# Altium PCB Clock.PcbDoc
Units mil, origin at the board's own origin, x right, y up, seen from the top; angles counter-clockwise.
Board outline 5830 x 1965 mil, 4 copper layers (Top Layer, Layer 1, Layer 2, Bottom Layer), stack 22.378 mil thick; 27 components, 78 nets, 221 pads, 37 vias.
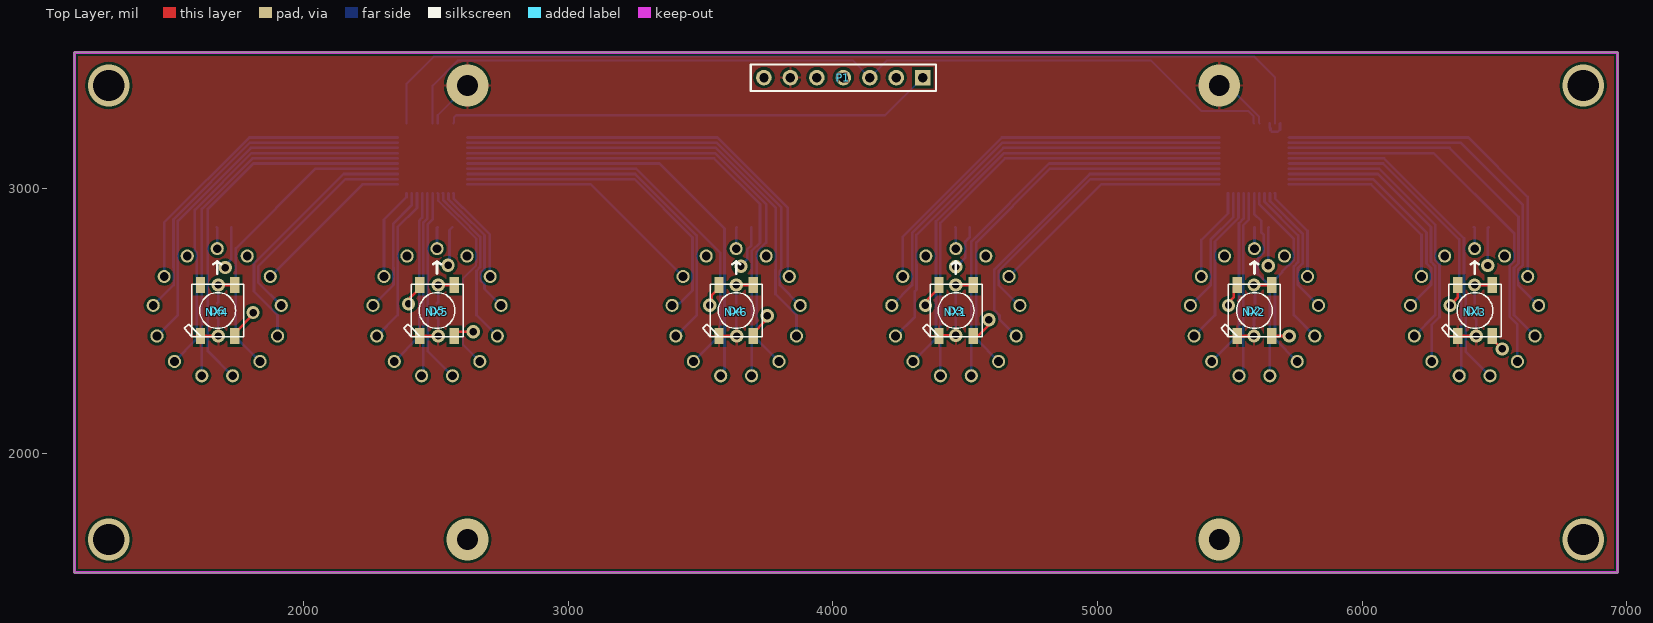
[diagram p0: Top Layer view]
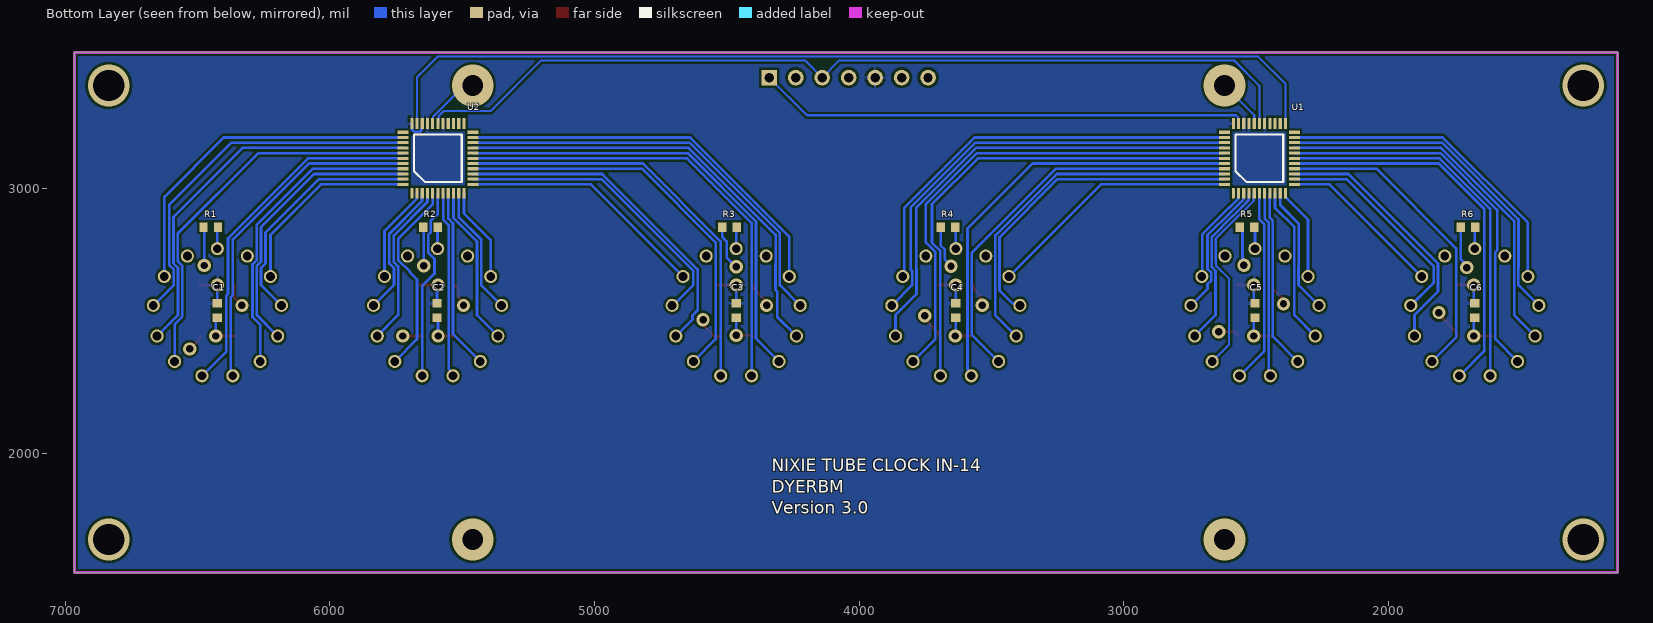
[diagram p1: Bottom Layer view, seen from below]
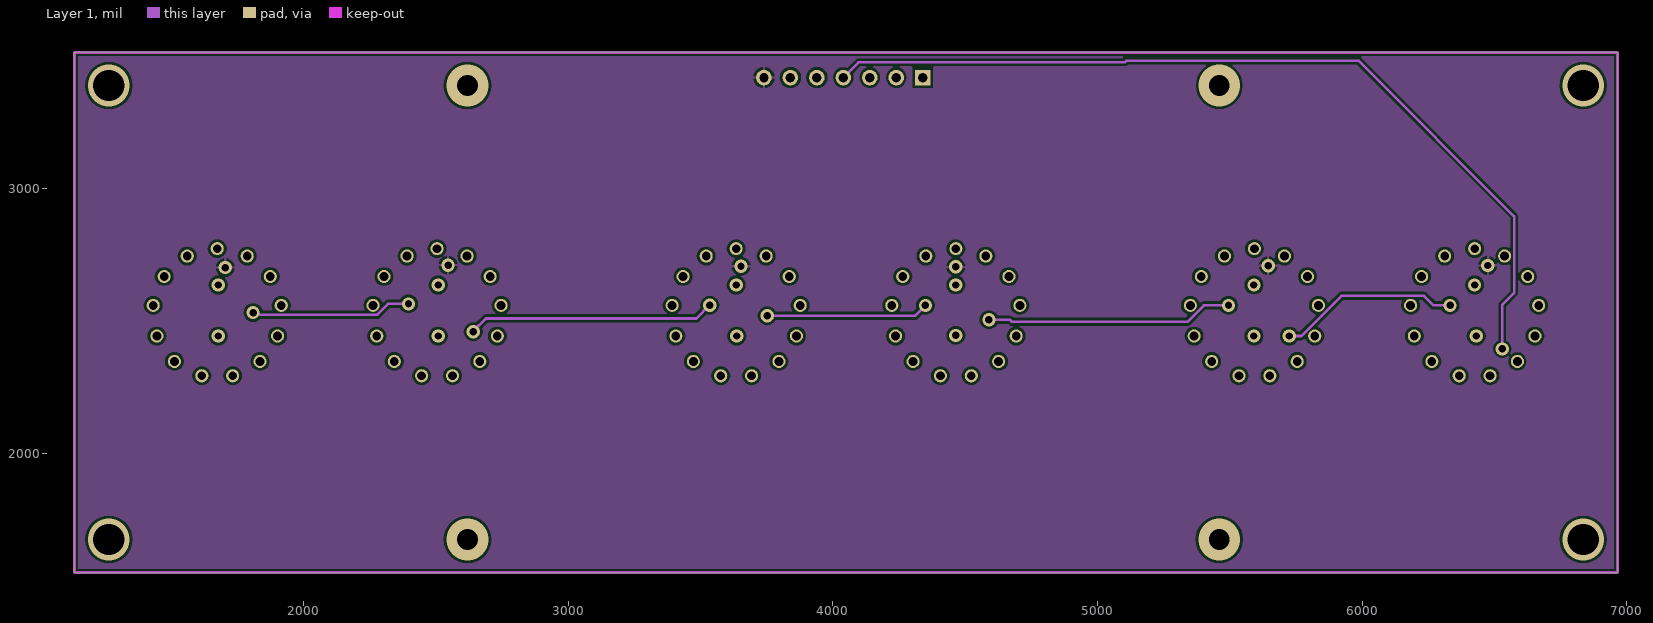
[diagram p2: Layer 1]
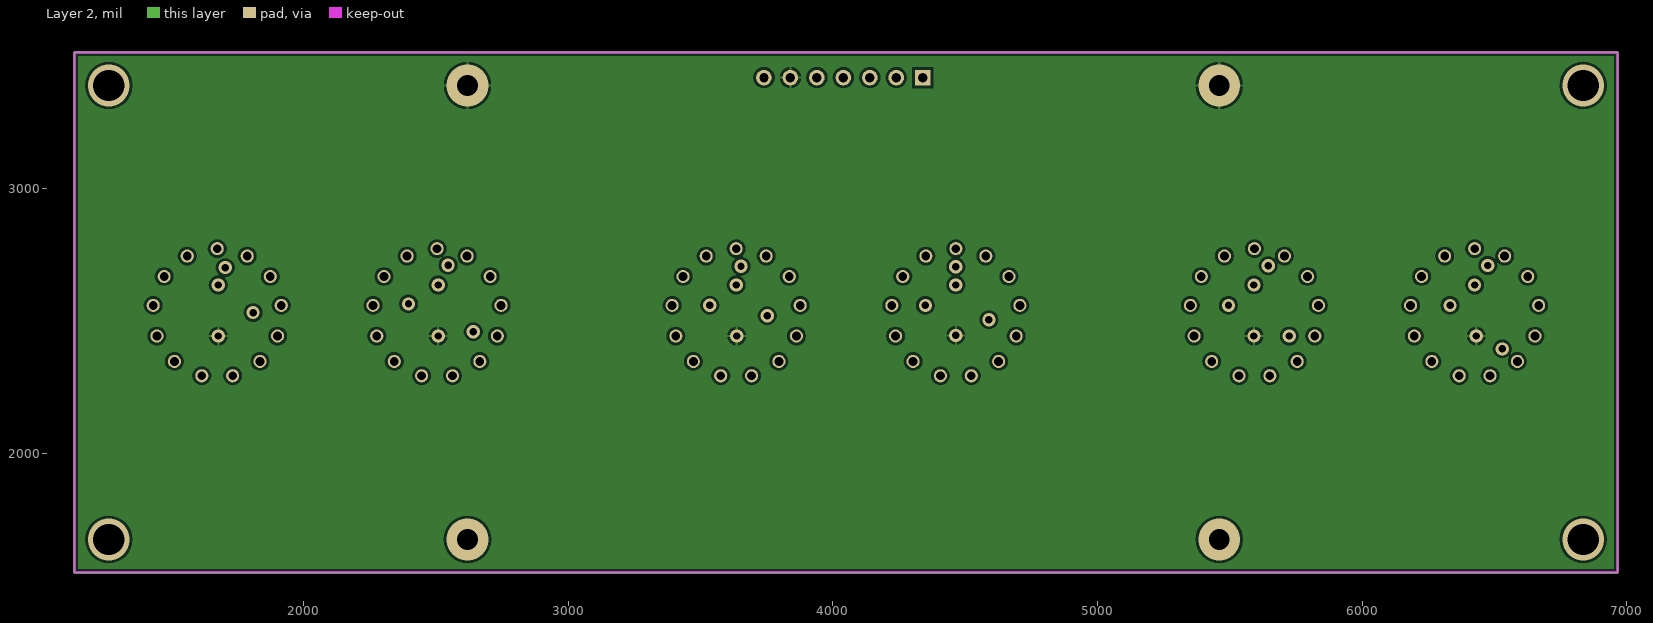
[diagram p3: Layer 2]

## Layer stack, top to bottom
Top Solder: solder mask 0.4, Solder Resist, Dk 3.5
Top Layer: signal copper 1.4
Dielectric 2: prepreg 2.8, PP-006, Dk 4.1
Layer 1: signal copper 0.689
Dielectric 1: dielectric 12.6, FR-4, Dk 4.8
Layer 2: signal copper 0.689
Dielectric 3: prepreg 2.8, PP-006, Dk 4.1
Bottom Layer: signal copper 1.4
Bottom Solder: solder mask 0.4, Solder Resist, Dk 3.5

## Board outline
1135,1550 1135,3515 6965,3515 6965,1550

## Design rules (kind name [scope] priority, off if disabled: settings)
Clearance [All] p1: gap=10 ignorepadtopadclearanceinfootprint=FALSE except(0: Arc-Hole Track-Hole SMDPad-Hole THPad-Hole Via-Hole Fill-Hole Poly-Hole Region-Hole Text-Hole; 6: Arc-Arc Arc-Track Arc-SMDPad Arc-THPad Track-Track Track-SMDPad Track-THPad SMDPad-SMDPad SMDPad-THPad THPad-THPad)
Height [All] p1: minheight=0 maxheight=20000 prefheight=500
PolygonConnect [All] p1: connectstyle=Relief reliefconductorwidth=10 reliefentries=4 polygonreliefangle="90 Angle" airgapwidth=10
RoutingVias [All] p1: holewidth=28 width=25 viastyle="Through Hole" minholewidth=28 minwidth=25 maxholewidth=28 maxwidth=50
SolderMaskExpansion [All] p1: expansion=4 istentingtop=FALSE
Width [All] p1: maxlimit=25 minlimit=8 preferedwidth=10 toplayer_prefwidth=8 midlayer1_minwidth=10 midlayer1_maxwidth=10 midlayer2_minwidth=10 midlayer2_maxwidth=10 bottomlayer_prefwidth=8 minimp=50.000000 maximp=50.000000 favimp=50.000000
29 further rules are at their usual default settings.

## Components (designator, comment, footprint, x,y, rotation, side; value= is the part's Value field where it differs from the comment)
C1 "0.1uF" 1608[0603] 6425,2540 r90 bottom
C2 "0.1uF" 1608[0603] 5595,2540 r90 bottom
C3 "0.1uF" 1608[0603] 4465,2540 r90 bottom
C4 "0.1uF" 1608[0603] 3635,2540 r90 bottom
C5 "0.1uF" 1608[0603] 2505,2540 r90 bottom
C6 "0.1uF" 1608[0603] 1674.44,2540 r90 bottom
D1 "WS2812B" WS2812B 6426.22,2540 r90 top
D2 "WS2812B" WS2812B 5593.08,2540 r90 top
D3 "WS2812B" WS2812B 4466.22,2540 r90 top
D4 "WS2812B" WS2812B 3635,2540 r90 top
D5 "WS2812B" WS2812B 2505,2540 r90 top
D6 "WS2812B" WS2812B 1676.22,2540 r90 top
NX1 "in-14-2" IN-14 4465,2530 r180 top locked
NX2 "in-14-2" IN-14 5593.08,2530 r180 top locked
NX3 "in-14-2" IN-14 6425,2530 r180 top locked
NX4 "in-14-2" IN-14 1674.44,2530 r180 top locked
NX5 "in-14-2" IN-14 2505,2530 r180 top locked
NX6 "in-14-2" IN-14 3635,2530 r180 top locked
P1 "Header 7" HDR1X7 4340,3420 r180 top locked
R1 "Res1" 1608[0603] 6450,2855 r0 bottom value=20K
R2 "Res1" 1608[0603] 5620,2855 r0 bottom value=20K
R3 "Res1" 1608[0603] 4490,2855 r0 bottom value=20K
R4 "Res1" 1608[0603] 3665,2855 r0 bottom value=20K
R5 "Res1" 1608[0603] 2535,2855 r0 bottom value=20K
R6 "Res1" 1608[0603] 1700,2855 r0 bottom value=20K
U1 "HV5623" Quad44 2586.54,2983.11 r90 bottom
U2 "HV5623" Quad44 5690.31,2983.11 r90 bottom

## Footprints (in the part's own frame and the unit in brackets; to place one, negate y for a bottom-side part, rotate by r counter-clockwise, add the part's x,y. Pads: shape width x height; smd on the part's side, far side on the other; paste and mask are expansions set on the pad)
1608[0603] [mm] "Chip Capacitor, Body 1.6x0.8mm, IPC High Density"
  rect 0.8x0.9 smd: 1(-0.7,0) 2(0.7,0)
  body extent -0.87,-0.48 0.87,0.48, height 1.3
HDR1X7 [mm] "Connector; Header; 7 Position"
  rect 1.5x1.5 hole 0.9: 1(0,0)
  round 1.5 hole 0.9: 2(2.54,0) 3(5.08,0) 4(7.62,0) 5(10.16,0) 6(12.7,0) 7(15.24,0)
  silkscreen extent -1.27,-1.27 16.51,1.27
IN-14 [mil]
  round 49.6 hole 33.07: 0(200.56,-138.44) 1(-200.56,-138.44) 2(-241.92,-29.37) 3(-227.86,86.42) 4(-161.6,182.41) 5(-58.32,236.62) 6(58.32,236.62) 7(161.6,182.41) 8(227.86,86.42) 9(241.92,-29.37) A(0,-243.7) LHDP(113.25,-215.78) RHDP(-113.25,-215.78)
  silkscreen extent -15,-195 15,-150, body extent -364,-364 364,364, height 1872
Quad44 [mm]
  oval 1.05x0.3 smd: 1(0,0)
  rect 1.05x0.3 smd: 2(0,-0.5) 3(0,-1) 4(0,-1.5) 5(0,-2) 6(0,-2.5) 7(0,-3) 8(0,-3.5) 9(0,-4) 10(0,-4.5) 11(0,-5) 23(6.7,-5) 24(6.7,-4.5) 25(6.7,-4) 26(6.7,-3.5) 27(6.7,-3) 28(6.7,-2.5) 29(6.7,-2) 30(6.7,-1.5) 31(6.7,-1) 32(6.7,-0.5) 33(6.7,0)
  rect 0.3x1.05 smd: 12(0.85,-5.85) 13(1.35,-5.85) 14(1.85,-5.85) 15(2.35,-5.85) 16(2.85,-5.85) 17(3.35,-5.85) 18(3.85,-5.85) 19(4.35,-5.85) 20(4.85,-5.85) 21(5.35,-5.85) 22(5.85,-5.85) 34(5.85,0.85) 35(5.35,0.85) 36(4.85,0.85) 37(4.35,0.85) 38(3.85,0.85) 39(3.35,0.85) 40(2.85,0.85) 41(2.35,0.85) 42(1.85,0.85) 43(1.35,0.85) 44(0.85,0.85)
  silkscreen extent 1.06,-4.79 5.64,-0.21
WS2812B [mm]
  rect 1.5x0.9 smd: 1-VDD(2.45,-1.65) 2-DOUT(2.45,1.65) 3-GND(-2.45,1.65) 4-DIN(-2.45,-1.65)
  silkscreen extent -2.5,-2.5 2.5,3.2

## Part data
C1 C2 C3 C4 C5 C6: library part Cap, "Capacitor", LatestRevisionDate=17-Jul-2002, LatestRevisionNote="Re-released for DXP Platform.", PackageDescription="Radial Cap, Thru-Hole; 2 Leads; 0.3 in Pin Spacing", PackageReference=RAD-0.3, Published=8-Jun-2000, Publisher="Altium Limited"
D1 D2 D3 D4 D5 D6: "Raspberry Pi HAT _40 pin_ Wheeled Robotics Kit", Package=None, Availability=Unavailable, MF="SparkFun Electronics", MP=WS2812B, Price=None, SnapEDA_Link=https://www.snapeda.com/parts/WS2812B/Worldsemi/view-part/1038297/?ref=snap
NX1 NX2 NX3 NX4 NX5 NX6: library part in-8
P1: "Header, 7-Pin", LatestRevisionDate=17-Jul-2002, LatestRevisionNote="Re-released for DXP Platform.", Publisher="Altium Limited"
R1 R2 R3 R4 R5 R6: "Resistor", LatestRevisionDate=17-Jul-2002, LatestRevisionNote="Re-released for DXP Platform.", PackageDescription="Axial Device, Thru-Hole; 2 Leads; 0.3 in Pin Spacing", PackageReference=AXIAL-0.3, Published=8-Jun-2000, Publisher="Altium Limited"
U1 U2: library part HV5622

## Via types
v1: diameter 50, hole 28, Top Layer to Bottom Layer, tented both sides, 29 vias
v2: diameter 157.48, hole 118.11, Top Layer to Bottom Layer, 4 vias
v3: diameter 157.48, hole 78.74, Top Layer to Bottom Layer, 4 vias

## Nets (pads, with @x,y where several pads share a name; then routed paths per layer and width w, separated by ;. In a path a pad name is that pad's centre, name@x,y a point inside that pad or via, vN(x,y) a via of type N, cw(c..) or ccw(c..) an arc to the next point about the centre after c; other vN are vias at no path point)
5V: C1.2 C2.2 C3.2 C4.2 C5.2 C6.2 D1.1-VDD D2.1-VDD D3.1-VDD D4.1-VDD D5.1-VDD D6.1-VDD P1.5 U1.27 U1.30 U1.31 U1.33 U2.27 U2.30 U2.31 U2.33 | length 897.9
  Top Layer w10: v1(1678.64,2636.46) D6.1-VDD ; v1(2509.2,2636.46) D5.1-VDD ; v1(3635,2636.46) D4.1-VDD ; v1(4465,2636.53) 4531.11,2636.53 D3.1-VDD ; v1(5591.26,2636.53) D2.1-VDD D2.1-VDD ; v1(6425,2636.46) D1.1-VDD
  Bottom Layer w10: C6.2 1678.64,2571.76 v1(1678.64,2636.46) ; C5.2 2509.2,2571.76 v1(2509.2,2636.46) ; C4.2 v1(3635,2636.46) ; C3.2 v1(4465,2636.53) ; v1(5591.26,2636.53) 5595,2632.79 C2.2 ; U2.31 5650.94,3232.13 5653.72,3229.35 5653.72,3221.66 5660.17,3215.22 5681.09,3215.22 5689.41,3223.54 5689.41,3245.98 U2.33 ; C1.2 v1(6425,2636.46)
CLK: P1.3 U1.28 U2.28 | length 3452.3
  Bottom Layer w8: U1.28 2488.11,3389.26 2583.85,3485 4075,3485 P1.3 4205,3485 5201.21,3485 5392.65,3293.56 5569.19,3293.56 5589.98,3272.77 5589.98,3248.8 U2.28
DIN: P1.1 U1.32 | length 1857.2
  Bottom Layer w8: U1.32 2568.76,3248.8 2568.76,3269.83 2576.49,3277.56 4197.56,3277.56 P1.1
GND: C1.1 C2.1 C3.1 C4.1 C5.1 C6.1 D1.3-GND D2.3-GND D3.3-GND D4.3-GND D5.3-GND D6.3-GND P1.6 U1.29 U2.29 | length 1235.5
  Top Layer w10: D6.3-GND 1611.3,2443.58 v1(1678.64,2443.58) ; D5.3-GND 2440.08,2443.58 v1(2509.2,2443.58) ; D4.3-GND 3570.08,2443.58 v1(3637.44,2443.58) ; D3.3-GND 4403.74,2446.02 v1(4465,2446.02) ; D2.3-GND 5528.16,2443.58 v1(5591.26,2443.58) ; D1.3-GND v1(6431,2443.54)
  Bottom Layer w8: U1.29 2507.8,3277.8 v3(2620,3390) ; v3(5460,3390) 5492.55,3390 5609.67,3272.88 5609.67,3248.8 U2.29
  Bottom Layer w10: C6.1 1678.64,2508.24 v1(1678.64,2443.58) ; C5.1 2509.2,2508.24 v1(2509.2,2443.58) ; C4.1 3635,2446.02 v1(3637.44,2443.58) ; v1(4465,2446.02) C3.1 ; v1(5591.26,2443.58) 5591.26,2508.7 C2.1 ; C1.1 6431,2506.44 v1(6431,2443.54)
HV: P1.7 R1.2 R2.2 R3.2 R4.2 R5.2 R6.2 | length 941.2
  Bottom Layer w10: v1(1705,2702.03) 1705,2712.86 1727.56,2735.42 R6.2 ; v1(2546.53,2711.36) 2551.81,2716.64 2551.81,2844.25 R5.2 ; v1(3653.32,2707.39) 3653.32,2709.68 3676.77,2733.12 3676.77,2770.18 3692.56,2785.98 R4.2 ; v1(4465,2705) 4500.8,2740.8 4500.8,2800.97 4517.56,2817.73 R3.2 ; v1(5644.88,2709.2) 5644.88,2852.32 R2.2 ; v1(6475,2710) 6475,2852.44 R1.2
LED: D1.4-DIN P1.4 | length 3388.5
  Top Layer w10: D1.4-DIN 6491.18,2431.73 6527.91,2395 v1(6529.16,2395)
  Layer 1 w10: P1.4 4097.46,3477.46 5103.77,3477.46 5110.06,3483.74 5986.26,3483.74 6574.05,2895.95 6574.05,2605.66 6529.16,2560.77 v1(6529.16,2395)
NetD1_2-DOUT: D1.2-DOUT D2.4-DIN | length 840.9
  Top Layer w10: D2.4-DIN 5658.08,2443.58 v1(5725,2443.58) ; v1(6332.24,2559.37) 6361.26,2588.39 D1.2-DOUT
  Layer 1 w10: v1(5725,2443.58) 5770.31,2443.58 5921.9,2595.17 6233.63,2595.17 6269.43,2559.37 v1(6332.24,2559.37)
NetD2_2-DOUT: D2.2-DOUT D3.4-DIN | length 1127.7
  Top Layer w10: D3.4-DIN 4539.72,2435 4590,2485.28 v1(4590,2505) ; v1(5495,2559.37) 5495,2570.19 5515.4,2590.6 5515.4,2623.74 D2.2-DOUT
  Layer 1 w10: v1(4590,2505) 4669.37,2505 4677.19,2497.18 5339.61,2497.18 5401.79,2559.37 v1(5495,2559.37)
NetD3_2-DOUT: D3.2-DOUT D4.4-DIN | length 785.5
  Top Layer w10: D4.4-DIN 3699.96,2455.35 3744.79,2500.19 3744.79,2512.35 v1(3752.45,2520) ; v1@4357.65,2581.04 4401.26,2624.65 D3.2-DOUT
  Layer 1 w10: v1(3752.45,2520) 4310.63,2520 v1(4350,2559.37)
NetD4_2-DOUT: D4.2-DOUT D5.4-DIN | length 1107.4
  Top Layer w10: D5.4-DIN 2569.96,2447.28 2582.68,2460 v1(2641.64,2460) ; v1(3535,2560) 3542.65,2567.65 3542.65,2597.26 3570.04,2624.65 D4.2-DOUT
  Layer 1 w10: v1(2641.64,2460) 2641.64,2461.64 2690,2510 3485,2510 v1(3535,2560)
NetD5_2-DOUT: D5.2-DOUT D6.4-DIN | length 814.1
  Top Layer w10: D6.4-DIN 1741.18,2455.35 1810,2524.17 v1(1810,2532.09) ; v1(2397.2,2565) 2404.85,2572.65 2404.85,2589.46 2440.04,2624.65 D5.2-DOUT
  Layer 1 w10: v1(1810,2532.09) 1827.28,2532.09 1835.8,2523.57 2277.91,2523.57 2319.34,2565 v1(2397.2,2565)
NetNX1_0: NX1.0 U2.21 | length 1501.4
  Bottom Layer w10: NX1.0 4264.44,2819.16 4639.02,3193.74 U2.21
NetNX1_1: NX1.1 U2.12 | length 938.6
  Bottom Layer w10: NX1.1 5013.69,3016.57 U2.12
NetNX1_2: NX1.2 U2.13 | length 1142
  Bottom Layer w10: NX1.2 4703.76,2559.37 4626.6,2636.53 4626.6,2688.97 4973.89,3036.26 U2.13
NetNX1_3: NX1.3 U2.14 | length 1284.8
  Bottom Layer w10: NX1.3 4630,2506.44 4630,2521.57 4610.6,2540.97 4610.6,2695.6 4970.94,3055.95 U2.14
NetNX1_4: NX1.4 U2.15 | length 1517.4
  Bottom Layer w10: NX1.4 4542.45,2431.74 4542.45,2797.36 4820.72,3075.63 U2.15
NetNX1_5: NX1.5 U2.16 | length 1566.1
  Bottom Layer w10: NX1.5 4523.32,2800.86 4817.77,3095.32 U2.16
NetNX1_6: NX1.6 U2.17 | length 1731.9
  Bottom Layer w10: NX1.6 4406.68,2870.89 4650.79,3115 U2.17
NetNX1_7: NX1.7 U2.18 | length 1741.9
  Bottom Layer w10: NX1.7 4390,2434.19 4390,2876.83 4647.85,3134.68 U2.18
NetNX1_8: NX1.8 U2.19 | length 1695
  Bottom Layer w10: NX1.8 4310,2516.44 4310,2611.96 4316.24,2618.2 4316.24,2713.72 4315.95,2714.02 4315.95,2825.41 4644.91,3154.37 U2.19
NetNX1_9: NX1.9 U2.20 | length 1606.5
  Bottom Layer w10: NX1.9 4300.24,2636.53 4300.24,2707.1 4299.95,2707.39 4299.95,2832.04 4641.97,3174.05 U2.20
NetNX1_A: NX1.A R3.1 | length 82.4
  Bottom Layer w10: R3.1 4465,2852.44 NX1.A
NetNX2_0: NX2.0 U2.11 | length 356.5
  Bottom Layer w10: NX2.0 5392.52,2806.14 5493.46,2907.08 U2.11
NetNX2_1: NX2.1 U2.2 | length 365.6
  Bottom Layer w10: U2.2 5671.54,2982.2 5671.54,2963.22 5793.53,2841.22 5793.53,2837.08 5793.64,2836.97 NX2.1
NetNX2_2: NX2.2 U2.3 | length 514.2
  Bottom Layer w10: U2.3 5651.85,2982.2 5651.85,2953.15 5775,2830 5775,2717.45 5757.84,2700.29 5757.84,2636.53 NX2.2
NetNX2_3: NX2.3 U2.4 | length 631.6
  Bottom Layer w10: U2.4 5631.26,2950.9 5758.13,2824.03 5758.13,2723.21 5741.84,2706.92 5741.84,2522.68 NX2.3
NetNX2_4: NX2.4 U2.5 | length 754.1
  Bottom Layer w10: U2.5 5611.57,2941.37 5742.13,2810.81 5742.13,2730.95 5697.96,2686.78 5697.96,2684.42 5670.53,2656.98 5670.53,2431.74 NX2.4
NetNX2_5: NX2.5 U2.6 | length 734.3
  Bottom Layer w10: U2.6 5591.89,2904.57 5619.19,2877.27 5619.19,2834.35 5628.88,2824.66 5628.88,2758.87 5604.88,2734.87 5604.88,2679.48 5651.4,2632.96 NX2.5
NetNX2_6: NX2.6 U2.7 | length 705.2
  Bottom Layer w10: NX2.6 5534.76,2302.8 5551,2319.04 5551,2862.58 5572.2,2883.78 U2.7
NetNX2_7: NX2.7 U2.8 | length 685.7
  Bottom Layer w10: NX2.7 5535,2451.11 5535,2869.21 5552.52,2886.73 U2.8
NetNX2_8: NX2.8 U2.9 | length 609.2
  Bottom Layer w10: NX2.8 5444.32,2522.68 5444.32,2689.9 5444.03,2690.19 5444.03,2800.86 5532.83,2889.67 U2.9
NetNX2_9: NX2.9 U2.10 | length 491.1
  Bottom Layer w10: NX2.9 5428.32,2636.53 5428.32,2683.27 5428.03,2683.56 5428.03,2807.49 5513.15,2892.61 U2.10
NetNX2_A: NX2.A R2.1 | length 81.6
  Bottom Layer w10: R2.1 5593.08,2854.36 NX2.A
NetNX3_0: NX3.0 U2.44 | length 736.9
  Bottom Layer w10: U2.44 6033.43,3016.57 6224.44,2825.56 NX3.0
NetNX3_1: NX3.1 U2.35 | length 1295.7
  Bottom Layer w10: U2.35 6401.26,3193.74 6625.56,2969.44 NX3.1
NetNX3_2: NX3.2 U2.36 | length 1398.7
  Bottom Layer w10: U2.36 6370.94,3174.05 6607,2938 6607,2711.58 6589.76,2694.34 6589.76,2636.53 NX3.2
NetNX3_3: NX3.3 U2.37 | length 1465.4
  Bottom Layer w10: U2.37 6330.63,3154.37 6591,2894 6591,2718.2 6573.76,2700.96 6573.76,2522.68 NX3.3
NetNX3_4: NX3.4 U2.38 | length 1478.9
  Bottom Layer w10: U2.38 6270.31,3134.68 6575,2830 6575,2726.44 6557.76,2709.2 6557.76,2516.06 6586.6,2487.21 NX3.4
NetNX3_5: NX3.5 U2.39 | length 1346.4
  Bottom Layer w10: U2.39 6082.63,3115 6385,2812.63 6385,2602.16 6391,2596.16 6391,2385.7 NX3.5
NetNX3_6: NX3.6 U2.40 | length 1283.6
  Bottom Layer w10: U2.40 6079.69,3095.32 6366.68,2808.32 6366.68,2597.86 6375,2589.54 6375,2319.04 6374.26,2318.3 6374.26,2300.96 NX3.6
NetNX3_7: NX3.7 U2.41 | length 1175
  Bottom Layer w10: U2.41 6064.37,3075.63 6275.95,2864.05 6275.95,2730.95 6292.24,2714.66 6292.24,2515.09 6263.4,2486.24 NX3.7
NetNX3_8: NX3.8 U2.42 | length 1070.4
  Bottom Layer w10: U2.42 6059.06,3055.95 6259.95,2855.05 6259.95,2724.32 6276.24,2708.03 6276.24,2522.68 NX3.8
NetNX3_9: NX3.9 U2.43 | length 917.3
  Bottom Layer w10: U2.43 6041.74,3036.26 6243,2835 6243,2717.95 6260.24,2700.7 6260.24,2636.53 NX3.9
NetNX3_A: NX3.A R1.1 | length 82.4
  Bottom Layer w10: R1.1 6425,2852.44 NX3.A
NetNX4_0: NX4.0 U1.21 | length 1219
  Bottom Layer w10: NX4.0 1473.88,2871.76 1795.86,3193.74 U1.21
NetNX4_1: NX4.1 U1.12 | length 625.4
  Bottom Layer w10: NX4.1 2223.14,3016.57 U1.12
NetNX4_2: NX4.2 U1.13 | length 846.7
  Bottom Layer w10: NX4.2 1829.14,2646.59 1829.14,2706.17 2159.23,3036.26 U1.13
NetNX4_3: NX4.3 U1.14 | length 993.7
  Bottom Layer w10: NX4.3 1902.3,2522.8 1813.14,2611.96 1813.14,2716.82 2152.27,3055.95 U1.14
NetNX4_4: NX4.4 U1.15 | length 1200.9
  Bottom Layer w10: NX4.4 1745,2438.63 1745,2775 2045.63,3075.63 U1.15
NetNX4_5: NX4.5 U1.16 | length 1457.8
  Bottom Layer w10: NX4.5 1638.64,2387.5 1638.64,2923.38 1810.57,3095.32 U1.16
NetNX4_6: NX4.6 U1.17 | length 1449.5
  Bottom Layer w10: NX4.6 1616.12,2923.49 1807.63,3115 U1.17
NetNX4_7: NX4.7 U1.18 | length 1465.3
  Bottom Layer w10: NX4.7 1596.99,2431.74 1596.99,2760.61 1590,2767.6 1590,2920 1804.68,3134.68 U1.18
NetNX4_8: NX4.8 U1.19 | length 1412.6
  Bottom Layer w10: NX4.8 1525.68,2522.68 1525.68,2708.36 1525.39,2708.66 1525.39,2878.01 1801.74,3154.37 U1.19
NetNX4_9: NX4.9 U1.20 | length 1324.1
  Bottom Layer w10: NX4.9 1509.68,2636.53 1509.68,2701.74 1509.39,2702.03 1509.39,2884.64 1798.8,3174.05 U1.20
NetNX4_A: NX4.A R6.1 | length 82.1
  Bottom Layer w10: R6.1 1674.44,2853 NX4.A
NetNX5_0: NX5.0 U1.11 | length 350
  Bottom Layer w10: NX5.0 2304.44,2883.1 2389.69,2968.35 U1.11
NetNX5_1: NX5.1 U1.2 | length 372.5
  Bottom Layer w10: U1.2 2567.76,2982.2 2567.76,2963.22 2601.98,2928.99 2602.64,2928.99 2703.42,2828.21 2703.42,2670.58 NX5.1
NetNX5_2: NX5.2 U1.3 | length 519.1
  Bottom Layer w10: U1.3 2548.07,2982.2 2548.07,2959.76 2558.86,2948.97 2559.37,2948.97 2595.36,2912.99 2596.02,2912.99 2684.15,2824.86 2684.15,2697.66 2683.51,2697.02 2669.76,2683.27 2669.76,2653.61 2683.51,2639.86 2684.15,2639.22 2684.15,2622.14 NX5.2
NetNX5_3: NX5.3 U1.4 | length 637.1
  Bottom Layer w10: U1.4 2528.39,2982.2 2528.39,2956.82 2552.23,2932.97 2552.75,2932.97 2588.73,2896.99 2589.39,2896.99 2668.05,2818.33 2668.05,2704.19 2653.76,2689.9 2653.76,2522.68 NX5.3
NetNX5_4: NX5.4 U1.5 | length 743.7
  Bottom Layer w8: U1.5 2509.7,2981.2 2509.7,2954.29 2546.01,2917.97 2546.53,2917.97 2582.52,2881.99 2583.18,2881.99 2653.05,2812.11 2653.05,2721.5 2652.51,2720.96 2652.51,2709.86 2602.64,2660 2602.64,2411.55 NX5.4
NetNX5_5: NX5.5 U1.6 | length 736.6
  Bottom Layer w10: U1.6 2488.11,2884.69 2469.2,2865.78 2469.2,2387.5 NX5.5
NetNX5_6: NX5.6 U1.7 | length 698.7
  Bottom Layer w10: NX5.6 2453.2,2299.9 2453.2,2872.4 2468.43,2887.63 U1.7
NetNX5_7: NX5.7 U1.8 | length 679.2
  Bottom Layer w10: NX5.7 2437.2,2441.39 2437.2,2879.03 2448.74,2890.58 U1.8
NetNX5_8: NX5.8 U1.9 | length 602.7
  Bottom Layer w10: NX5.8 2356.24,2522.68 2356.24,2708.36 2355.95,2708.66 2355.95,2854.7 2429.06,2927.81 U1.9
NetNX5_9: NX5.9 U1.10 | length 484.6
  Bottom Layer w10: NX5.9 2340.24,2636.53 2340.24,2701.74 2339.95,2702.03 2339.95,2868.37 2409.37,2937.79 U1.10
NetNX5_A: NX5.A R5.1 | length 82.3
  Bottom Layer w10: NX5.A 2505,2852.56 R5.1
NetNX6_0: NX6.0 U1.44 | length 958.6
  Bottom Layer w10: U1.44 3086.3,3016.57 NX6.0
NetNX6_1: NX6.1 U1.35 | length 1581.9
  Bottom Layer w10: U1.35 3564.14,3193.74 3830,2927.88 3830,2674 NX6.1
NetNX6_2: NX6.2 U1.36 | length 1691
  Bottom Layer w10: U1.36 3561.2,3174.05 3805,2930.25 3805,2694.01 3799.76,2688.77 3799.76,2636.53 NX6.2
NetNX6_3: NX6.3 U1.37 | length 1775.5
  Bottom Layer w10: U1.37 3558.26,3154.37 3784.05,2928.57 3784.05,2695.69 3783.76,2695.4 3783.76,2601.9 3862.86,2522.8 NX6.3
NetNX6_4: NX6.4 U1.38 | length 1852
  Bottom Layer w10: U1.38 3555.32,3134.68 3748.25,2941.75 3748.25,2796.41 3712.45,2760.61 3712.45,2431.74 NX6.4
NetNX6_5: NX6.5 U1.39 | length 1838.3
  Bottom Layer w10: U1.39 3551.75,3115 3725,2941.75 3725,2795.79 3693.32,2764.11 NX6.5
NetNX6_6: NX6.6 U1.40 | length 1635.2
  Bottom Layer w10: U1.40 3345.66,3095.32 3591,2849.98 3591,2318.42 3576.68,2304.1 NX6.6
NetNX6_7: NX6.7 U1.41 | length 1538.4
  Bottom Layer w10: U1.41 3256.2,3075.63 3575,2756.83 3575,2449.19 NX6.7
NetNX6_8: NX6.8 U1.42 | length 1374.9
  Bottom Layer w10: U1.42 3253.26,3055.95 3485.95,2823.26 3485.95,2730.95 3486.24,2730.66 3486.24,2522.68 NX6.8
NetNX6_9: NX6.9 U1.43 | length 1242.4
  Bottom Layer w10: U1.43 3250.32,3036.26 3469.95,2816.63 3469.95,2724.32 3470.24,2724.03 3470.24,2615.86 3421.33,2566.95 3400.66,2566.95 NX6.9
NetNX6_A: NX6.A R4.1 | length 82.3
  Bottom Layer w10: NX6.A 3635,2852.56 R4.1
NetU1_23: U1.23 U2.32 | length 3679.6
  Bottom Layer w8: U1.23 2389.69,3396.26 2492.43,3499 5593.08,3499 5670.63,3421.45 U2.32
pads on no net: D6.2-DOUT NX1.LHDP NX1.RHDP NX2.LHDP NX2.RHDP NX3.LHDP NX3.RHDP NX4.LHDP NX4.RHDP NX5.LHDP NX5.RHDP NX6.LHDP NX6.RHDP P1.2 U1.1 U1.22 U1.24 U1.25 U1.26 U1.34 U2.1 U2.22 U2.23 U2.24 U2.25 U2.26 U2.34
copper on no net:
  other v2: 1265,1675 6835,1675 1265,3390 6835,3390
  other v3: 2620,1675 5460,1675

## Polygon pours and split planes (outlines as drawn)
5V on Bottom Layer "5V_L04_P000" (solid, pour order 0): 1135,1550 1135,3515 6965,3515 6965,1550
GND on Layer 2 "GND_L03_P001" (solid, pour order 1): 1135,1550 1135,3515 6965,3515 6965,1550
HV on Layer 1 "HV_L02_P002" (solid, pour order 2): 1135,1550 1135,3515 6965,3515 6965,1550
GND on Top Layer "GND_L01_P003" (solid, pour order 3): 1135,1550 1135,3515 6965,3515 6965,1550

## Keep-outs
Keep-Out Layer:
  the board outline again, w10

## Silkscreen, mask and mechanical layers (free items; w line width, h text height)
Bottom Overlay:
  text "NIXIE TUBE CLOCK IN-14 / DYERBM / Version 3.0" at 4330,1755 h80